# EAGLE board PCB2 (EAGLE 9.6.2)
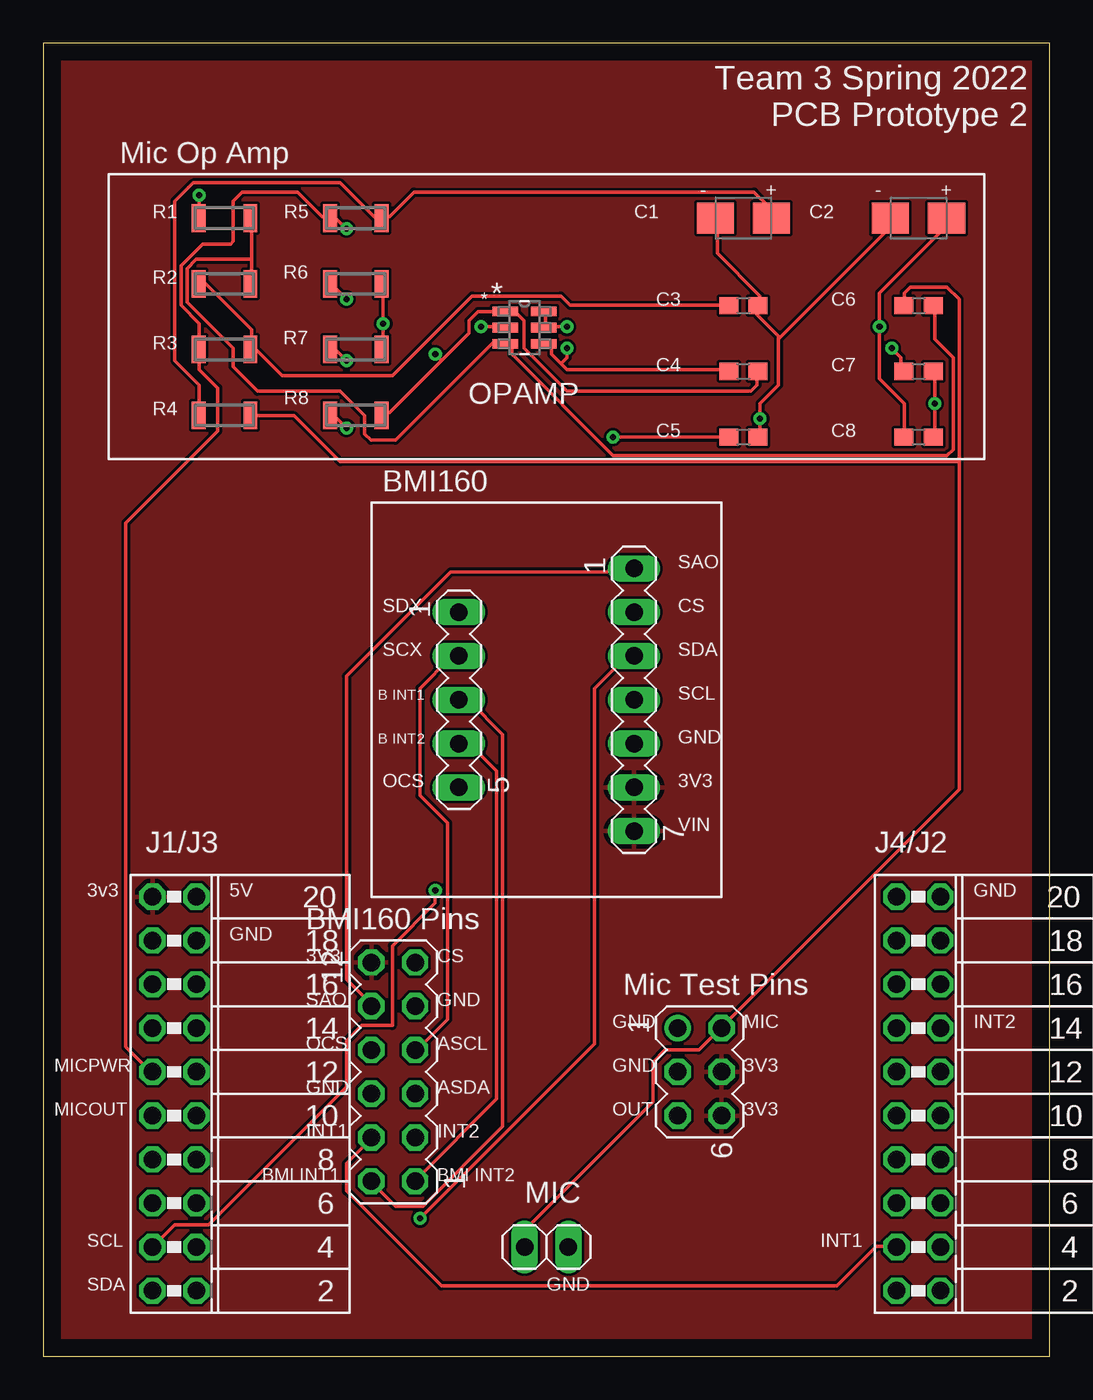
[diagram p0: board, top side]
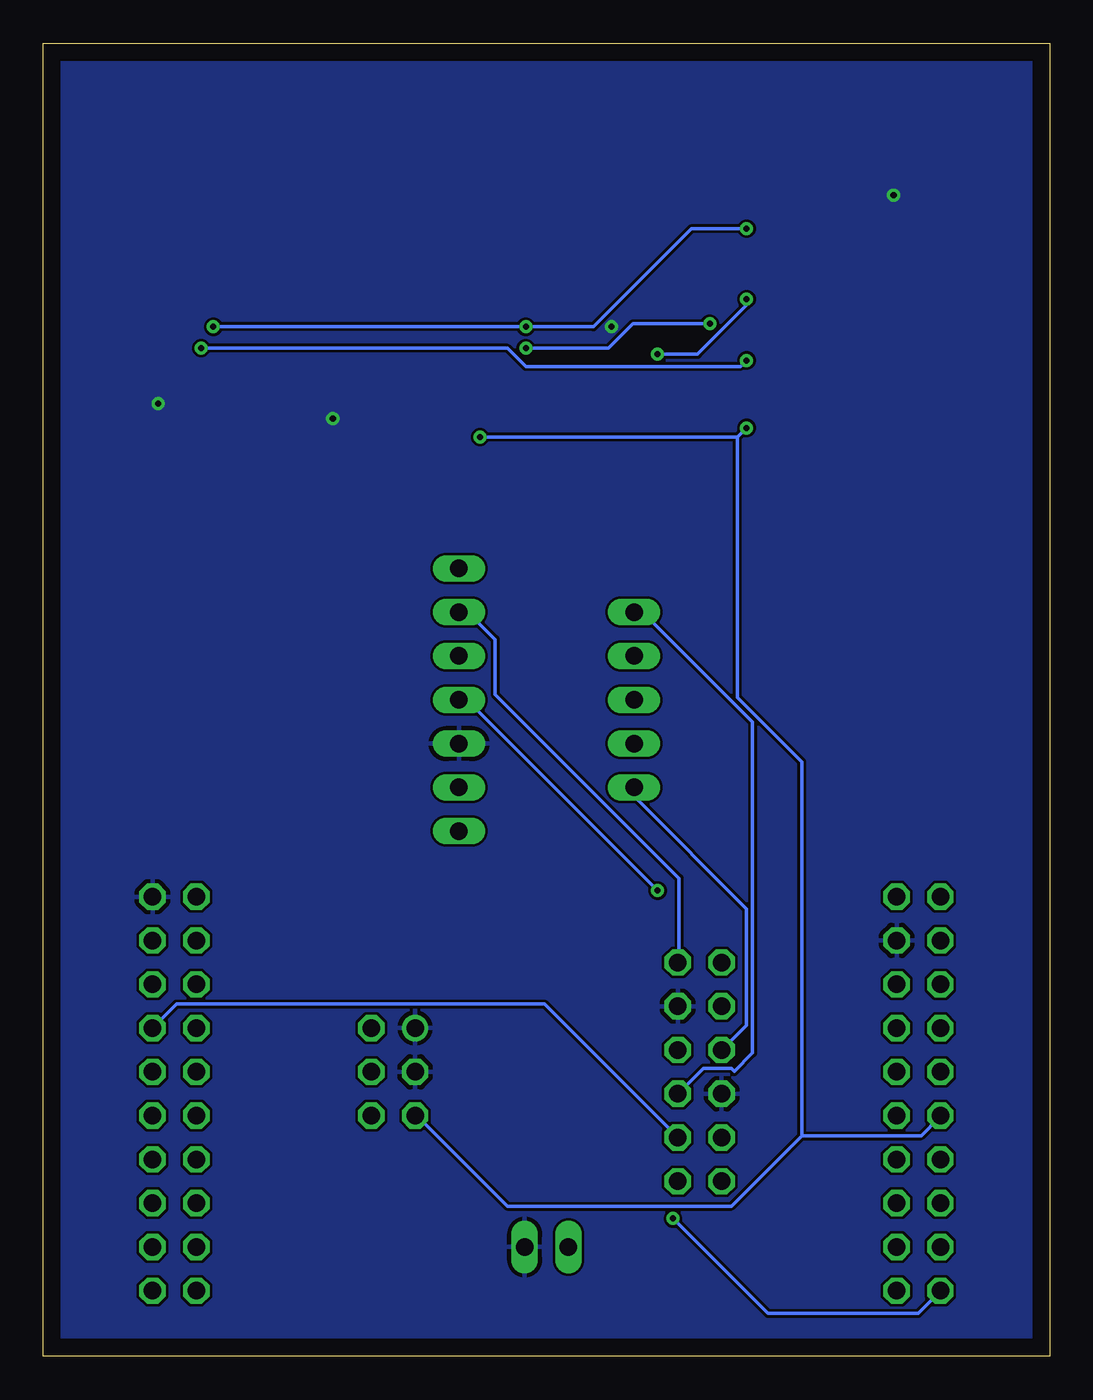
[diagram p1: board, bottom side, seen from below]

Size 58.42 x 76.2 mm. Coordinates in mm from the lower left corner, seen from the top.
Outline: 0,0 58.42,0 58.42,76.2 0,76.2 0,0
Copper layers (1*16): Top 0.035mm / dielectric 1.5mm / Bottom 0.035mm
Design rules "default": minimum track width 6mil, minimum drill 0.35mm, track to track 6mil, track to pad 6mil, pad to pad 6mil, via to via 6mil, smd to smd 6mil, copper to edge 40mil, drill to drill 6mil, minimum pad ring 10mil, minimum via ring 8mil, stop-mask expansion 4mil, vias tented up to drill 0mil, thermal gap 10mil
Net classes: 0 default: width 0.203 mm

## Footprints (pad centres in the part's own frame; a part is rotated, then mirrored left to right if it is on the bottom)
MA05-1 = drill 1.016 long: 1 -5.08,0; 2 -2.54,0; 3 0,0; 4 2.54,0; 5 5.08,0
MA07-1 = drill 1.016 long: 1 -7.62,0; 2 -5.08,0; 3 -2.54,0; 4 0,0; 5 2.54,0; 6 5.08,0; 7 7.62,0
MA06-2 = drill 1.016 octagon: 1 -6.35,-1.27; 2 -6.35,1.27; 3 -3.81,-1.27; 4 -3.81,1.27; 5 -1.27,-1.27; 6 -1.27,1.27; 7 1.27,-1.27; 8 1.27,1.27; 9 3.81,-1.27; 10 3.81,1.27; 11 6.35,-1.27; 12 6.35,1.27
B/3528-21W = smd 2.15 x 1.8: + 1.625,0; - -1.625,0
C0603 = smd 1.1 x 1: 1 -0.85,0; 2 0.85,0
FE10-2W = drill 1.016 octagon: 1 -11.43,1.27; 2 -11.43,-1.27; 3 -8.89,1.27; 4 -8.89,-1.27; 5 -6.35,1.27; 6 -6.35,-1.27; 7 -3.81,1.27; 8 -3.81,-1.27; 9 -1.27,1.27; 10 -1.27,-1.27; 11 1.27,1.27; 12 1.27,-1.27; 13 3.81,1.27; 14 3.81,-1.27; 15 6.35,1.27; 16 6.35,-1.27; 17 8.89,1.27; 18 8.89,-1.27; 19 11.43,1.27; 20 11.43,-1.27
1X02 = drill 1.016 long: 1 -1.27,0; 2 1.27,0
MA03-2 = drill 1.016: 1 -2.54,-1.27 | drill 1.016 octagon: 2 -2.54,1.27; 3 0,-1.27; 4 0,1.27; 5 2.54,-1.27; 6 2.54,1.27
DBV6 = smd 1.473 x 0.559: 1 -1.118,0.95; 2 -1.118,0; 3 -1.118,-0.95; 4 1.118,-0.95; 5 1.118,0; 6 1.118,0.95
MINI_MELF-0204R = smd 0.8 x 1.6: 1 -1.5,0; 2 1.5,0

## Placement (x,y rotation side)
BMI_HEADER_5  [MA05-1]  24.13,38.1 270 top
BMI_HEADER_7  [MA07-1]  34.29,38.1 270 top
BMI_MALE_HEADER  [MA06-2]  20.32,16.51 90 top
C1  4.7uF  [B/3528-21W]  40.64,66.04 0 top
C2  4.7uF  [B/3528-21W]  50.8,66.04 0 top
C3  0.47uF  [C0603]  40.64,60.96 0 top
C4  51pF  [C0603]  40.64,57.15 0 top
C5  0.015uF  [C0603]  40.64,53.34 0 top
C6  0.15uF  [C0603]  50.8,60.96 0 top
C7  0.47uF  [C0603]  50.8,57.15 0 top
C8  0.1uF  [C0603]  50.8,53.34 0 top
J1/J3  [FE10-2W]  7.62,15.24 90 top
J4/J2  [FE10-2W]  50.8,15.24 90 top
MIC_HEADER  [1X02]  29.21,6.35 0 top
MICTESTHEADER  [MA03-2]  38.1,16.51 270 top
OPAMP  TLV2760IDBVR  [DBV6]  27.94,59.69 0 top
R1  51k  [MINI_MELF-0204R]  10.53,66.04 0 top
R2  47k  [MINI_MELF-0204R]  10.53,62.23 0 top
R3  3k  [MINI_MELF-0204R]  10.53,58.42 0 top
R4  8.2k  [MINI_MELF-0204R]  10.53,54.61 0 top
R5  470  [MINI_MELF-0204R]  18.15,66.04 0 top
R6  200k  [MINI_MELF-0204R]  18.15,62.23 0 top
R7  820  [MINI_MELF-0204R]  18.15,58.42 0 top
R8  820  [MINI_MELF-0204R]  18.15,54.61 0 top

## Library data of the parts
BMI_HEADER_5 BMI_HEADER_7 BMI_MALE_HEADER MICTESTHEADER = con-lstb; OC_FARNELL: unknown; OC_NEWARK: unknown
C1-C8 = rcl; SPICEPREFIX: C
J1/J3 J4/J2 = con-lsta; OC_FARNELL: unknown; OC_NEWARK: unknown
MIC_HEADER = pinhead
OPAMP = TLV2760IDBVR; DATASHEET_URL: http://www.ti.com/lit/gpn/TLV2760; DESCRIPTION: Single 1.8-V, Micro-power, Rail-to-Rail, Single Supply Amplifier with Shutdown; FAMILY_NAME: LOW POWER; GENERIC_PART_NUMBER: TLV2760; INDUSTRY_STD_PKG_TYPE: SOT-23; MANUFACTURER: Texas Instruments; MANUFACTURER_PART_NUMBER: TLV2760IDBVR; PACKAGE_DESIGNATOR: DBV; PIN_COUNT: 6; VENDOR: Texas Instruments
R1-R8 = adafruit

## Nets
3.3V: BMI_HEADER_7.6 BMI_HEADER_7.7 BMI_MALE_HEADER.12 J1/J3.19 MICTESTHEADER.4 MICTESTHEADER.6
5V: J1/J3.20
A_IN2: J1/J3.17
A_IN23: J1/J3.16
A_IN24: J1/J3.14
A_IN25: J1/J3.12
A_IN27/I2S_WS: J1/J3.8
A_IN28/I2S_SCLK: J1/J3.6
A_OUT29/I2S_SDOUT: J1/J3.4
AMP_ON: J4/J2.6
AMP_ON_ALT: J4/J2.15
AMP_P1: C4.2 OPAMP.1 R6.1 R8.2
AMP_P3: C6.2 OPAMP.3 R1.2 R2.2
AMP_P4: C4.1 OPAMP.4 R6.2 R7.2
ASCL: BMI_HEADER_5.2 BMI_MALE_HEADER.7
ASDA: BMI_HEADER_5.1 BMI_MALE_HEADER.5
BMI_INT1: BMI_HEADER_5.3 BMI_MALE_HEADER.2
BMI_INT2: BMI_HEADER_5.4 BMI_MALE_HEADER.1
CS: BMI_HEADER_7.2 BMI_MALE_HEADER.11
DAC_MOSI: J4/J2.10
DAC_SCLK: J1/J3.7
DAC_SYNC: J4/J2.4
GND: BMI_HEADER_7.5 BMI_MALE_HEADER.6 BMI_MALE_HEADER.9 C1.- C2.- C3.2 C5.2 C7.2 C8.2 J1/J3.18 J4/J2.20 MIC_HEADER.2 MICTESTHEADER.1 MICTESTHEADER.3 OPAMP.2 R1.1
GPIO8: J1/J3.5
GPIO11: J4/J2.2
GPIO18: J4/J2.16
GPIO33: J4/J2.5
GPIO34: J4/J2.7
I2C_SCL: BMI_HEADER_7.4 J1/J3.3
I2C_SDA: BMI_HEADER_7.3 J1/J3.1
INT1: BMI_MALE_HEADER.4 J4/J2.3
INT2: BMI_MALE_HEADER.3 J4/J2.14
LAUNCHPAD_DACOUT: J1/J3.2
MIC_OUT: C5.1 J1/J3.9 MICTESTHEADER.5 R8.1
MIC_OUT_ALT: J1/J3.10
MIC_PWR: C2.+ C8.1 J1/J3.11 OPAMP.5 OPAMP.6 R3.1 R5.1
MIC_PWR_ALT: J4/J2.1
MIC_RAW: C6.1 MIC_HEADER.1 MICTESTHEADER.2 R4.2
N$1: C3.1 R2.1 R3.2
N$4: C1.+ R4.1 R5.2
N$6: C7.1 R7.1
OCS: BMI_HEADER_5.5 BMI_MALE_HEADER.8
PWM/GPIO37: J4/J2.13
PWM/GPIO40: J4/J2.19
PWM_ALT: J4/J2.17
PWM_AUDIO: J4/J2.18
RST: J4/J2.12
RX: J1/J3.15
SAO: BMI_HEADER_7.1 BMI_MALE_HEADER.10
SPI_MISO: J4/J2.8
TIME_CAP/GPIO36: J4/J2.11
TIMER_CAP/GPIO35: J4/J2.9
TX: J1/J3.13

## Tracks (layer width: path | path; a pad name or v marks a point on that pad's centre or on a via)
3.3V
  pour Top: 0,-1.27 59.69,-1.27 59.69,77.47 -1.27,77.47 -1.27,-1.27
AMP_P1  (via drill 0.35)
  Top 0.203: C4.2 41.43,57.07 41.43,56.36 41.07,56.01 30.4,56.01 27.91,58.5 27.91,60.1 27.38,60.63 26.85,60.63 OPAMP.1 26.67,60.63 25.25,60.63 24.71,60.1 24.71,59.38 23.11,57.78 | 23.11,57.78 20.09,54.76 19.74,54.76 R8.2 | v17.6,61.34 16.71,62.23 R6.1 | 23.11,57.78 v22.76,58.14
  Bottom 0.203: v17.6,61.34 17.6,60.98 20.45,58.14 v22.76,58.14
AMP_P3
  Top 0.203: 12.09,63.65 12.09,65.96 R1.2 | 12.09,63.65 12.09,62.23 R2.2 | C6.2 51.74,60.81 51.74,59.03 52.81,57.96 52.81,52.63 52.45,52.27 33.07,52.27 27.2,58.14 27.2,58.67 27.03,58.85 26.85,58.85 OPAMP.3 26.67,58.85 26.14,58.85 20.45,53.16 19.02,53.16 18.67,53.52 18.67,54.59 17.25,56.01 12.45,56.01 11.02,57.43 11.02,58.5 8.36,61.16 8.36,63.12 8.89,63.65 12.09,63.65
AMP_P4  (via drill 0.35)
  Top 0.203: R7.2 19.74,58.5 v19.74,59.92 19.74,62.23 R6.2 | 30.05,57.61 29.52,58.14 29.52,58.67 29.34,58.85 29.16,58.85 OPAMP.4 | 30.05,57.61 30.4,57.25 39.65,57.25 C4.1 | v30.4,58.5 30.4,57.96 30.05,57.61
  Bottom 0.203: v19.74,59.92 24.18,59.92 25.6,58.5 v30.4,58.5
ASCL
  Top 0.203: BMI_MALE_HEADER.7 21.69,17.78 23.47,19.56 23.47,30.94 21.87,32.54 21.87,38.76 23.65,40.54 24,40.54 BMI_HEADER_5.2
ASDA
  Bottom 0.203: BMI_MALE_HEADER.5 21.51,15.29 20.09,16.71 18.49,16.71 18.31,16.54 17.25,17.6 17.25,36.8 23.47,43.03 24,43.03 BMI_HEADER_5.1
BMI_INT1
  Top 0.203: BMI_MALE_HEADER.2 19.2,10.13 19.56,9.78 19.56,9.6 20.45,8.71 22.05,8.71 26.67,13.34 26.67,36.09 24.71,38.05 24.18,38.05 BMI_HEADER_5.3
BMI_INT2
  Top 0.203: BMI_HEADER_5.4 24.71,35.56 26.31,33.96 26.31,14.94 21.69,10.31 BMI_MALE_HEADER.1
CS
  Bottom 0.203: BMI_MALE_HEADER.11 21.51,22.94 21.51,27.74 32.18,38.41 32.18,41.6 33.6,43.03 34.14,43.03 BMI_HEADER_7.2
GND  (via drill 0.35)
  Top 0.203: 42.67,59.03 42.67,59.21 41.43,60.45 41.43,60.81 C3.2 41.6,60.98 41.6,61.52 39.12,64.01 39.12,65.96 C1.- | 42.67,59.03 42.67,56.36 41.6,55.3 v41.6,54.41 41.6,53.34 C5.2 | 42.67,59.03 49.07,65.43 49.07,65.96 C2.- | C8.2 51.74,53.34 v51.74,55.3 51.74,57.07 C7.2 | v25.43,59.74 26.67,59.74 OPAMP.2 | v9.07,67.39 9.07,66.14 R1.1
  pour Bottom: -1.27,77.47 59.69,77.47 59.69,-1.27 -1.27,-1.27
I2C_SCL  (via drill 0.35)
  Top 0.203: J1/J3.3 7.64,7.64 9.6,7.64 17.6,15.65 17.6,18.31 18.49,19.2 20.27,19.2 20.27,23.82 22.76,26.31 v22.76,27.03
  Bottom 0.203: v22.76,27.03 33.78,38.05 34.14,38.05 BMI_HEADER_7.4
I2C_SDA  (via drill 0.35)
  Top 0.203: v21.87,8 32,18.14 32,38.76 33.78,40.54 34.14,40.54 BMI_HEADER_7.3
  Bottom 0.203: v21.87,8 16.36,2.49 7.64,2.49 6.4,3.73 J1/J3.1
INT1
  Top 0.203: BMI_MALE_HEADER.4 19.02,12.62 17.6,11.2 17.6,9.6 23.11,4.09 46.05,4.09 48.36,6.4 49.43,6.4 J4/J2.3
INT2
  Bottom 0.203: BMI_MALE_HEADER.3 29.34,20.45 50.67,20.45 J4/J2.14
MIC_OUT  (via drill 0.35)
  Top 0.203: v33.07,53.34 C5.1 | v17.6,53.87 16.71,54.76 R8.1
  Bottom 0.203: 18.14,53.34 v33.07,53.34 | v17.6,53.87 18.14,53.34 | 14.4,12.8 7.47,12.8 6.4,13.87 J1/J3.9 | 14.4,12.8 18.49,8.71 31.47,8.71 36.8,14.05 MICTESTHEADER.5 | 18.14,53.34 18.14,38.23 14.4,34.49 14.4,12.8
MIC_PWR  (via drill 0.35)
  Top 0.203: C8.1 49.96,53.34 49.96,55.3 48.54,56.72 v48.54,59.74 48.54,61.7 52.27,65.43 52.27,65.96 C2.+ | 29.16,59.74 29.16,60.63 OPAMP.6 | v30.4,59.74 29.16,59.74 | v17.6,65.43 17.07,65.96 16.71,65.96 R5.1 16.54,66.14 16.18,66.14 14.76,67.56 11.56,67.56 11.02,67.03 11.02,64.69 10.87,64.54 9.25,64.54 8,63.3 8,60.98 9.07,59.92 9.07,58.5 R3.1 9.07,58.32 9.07,57.25 10.13,56.19 10.13,53.7 4.8,48.36 4.8,17.96 6.22,16.54 J1/J3.11 | 29.16,59.74 OPAMP.5
  Bottom 0.203: v17.6,65.43 20.8,65.43 26.49,59.74 v30.4,59.74 v48.54,59.74
MIC_RAW
  Top 0.203: 53.16,51.92 53.16,32.89 39.47,19.2 MICTESTHEADER.2 39.29,19.02 38.05,17.78 36.09,17.78 35.38,17.07 35.38,14.76 28.09,7.47 28.09,6.4 MIC_HEADER.1 | 53.16,51.92 53.16,61.34 52.45,62.05 50.32,62.05 49.96,61.7 49.96,60.98 C6.1 | 53.16,51.92 17.25,51.92 14.58,54.59 12.09,54.59 R4.2
N$1
  Top 0.203: C3.1 39.65,60.98 30.58,60.98 30.05,61.52 24.89,61.52 20.27,56.9 13.87,56.9 12.45,58.32 12.09,58.32 R3.2 12.09,58.5 12.09,59.56 9.42,62.23 R2.1
N$4
  Top 0.203: R4.1 9.07,54.76 9.07,56.36 7.64,57.78 7.64,67.03 8.71,68.1 17.25,68.1 19.2,66.14 19.56,66.14 R5.2 19.74,66.14 20.09,66.14 21.51,67.56 41.25,67.56 42.14,66.67 42.14,66.14 C1.+
N$6  (via drill 0.35)
  Top 0.203: v49.25,58.5 49.78,57.96 49.78,57.25 C7.1 | v17.6,57.78 17.07,58.32 16.71,58.32 R7.1
  Bottom 0.203: v49.25,58.5 31.47,58.5 30.4,57.43 17.96,57.43 v17.6,57.78
OCS
  Bottom 0.203: BMI_MALE_HEADER.8 19.02,17.78 17.6,19.2 17.6,25.96 24,32.36 24,32.89 BMI_HEADER_5.5
SAO
  Top 0.203: BMI_MALE_HEADER.10 19.02,20.45 17.6,21.87 17.6,39.47 23.65,45.52 32.72,45.52 32.89,45.7 34.14,45.7 BMI_HEADER_7.1

## Text on the board
tNames: Team 3 Spring 2022 / PCB Prototype 2 | Mic Op Amp | - | + | - | + | * | BMI160 | SAO | SDX | CS | SCX | SDA | B INT1 | SCL | B INT2 | GND | OCS | 3V3 | VIN | 3v3 | 5V | GND | BMI160 Pins | GND | 3V3 | CS | Mic Test Pins | SAO | GND | GND | MIC | INT2 | OCS | ASCL | MICPWR | GND | 3V3 | GND | ASDA | MICOUT | OUT | 3V3 | INT1 | INT2 | BMI INT1 | BMI INT2 | MIC | SCL | INT1 | SDA | GND